# Altium PCB PCB1.PcbDoc
Units mil, origin at the board's own origin, x right, y up, seen from the top; angles counter-clockwise.
Board outline 1895 x 950 mil, 2 copper layers (Top Layer, Bottom Layer); 24 components, 14 nets, 60 pads, 1 vias.
Unrouted connection lines stored in the file: 42.
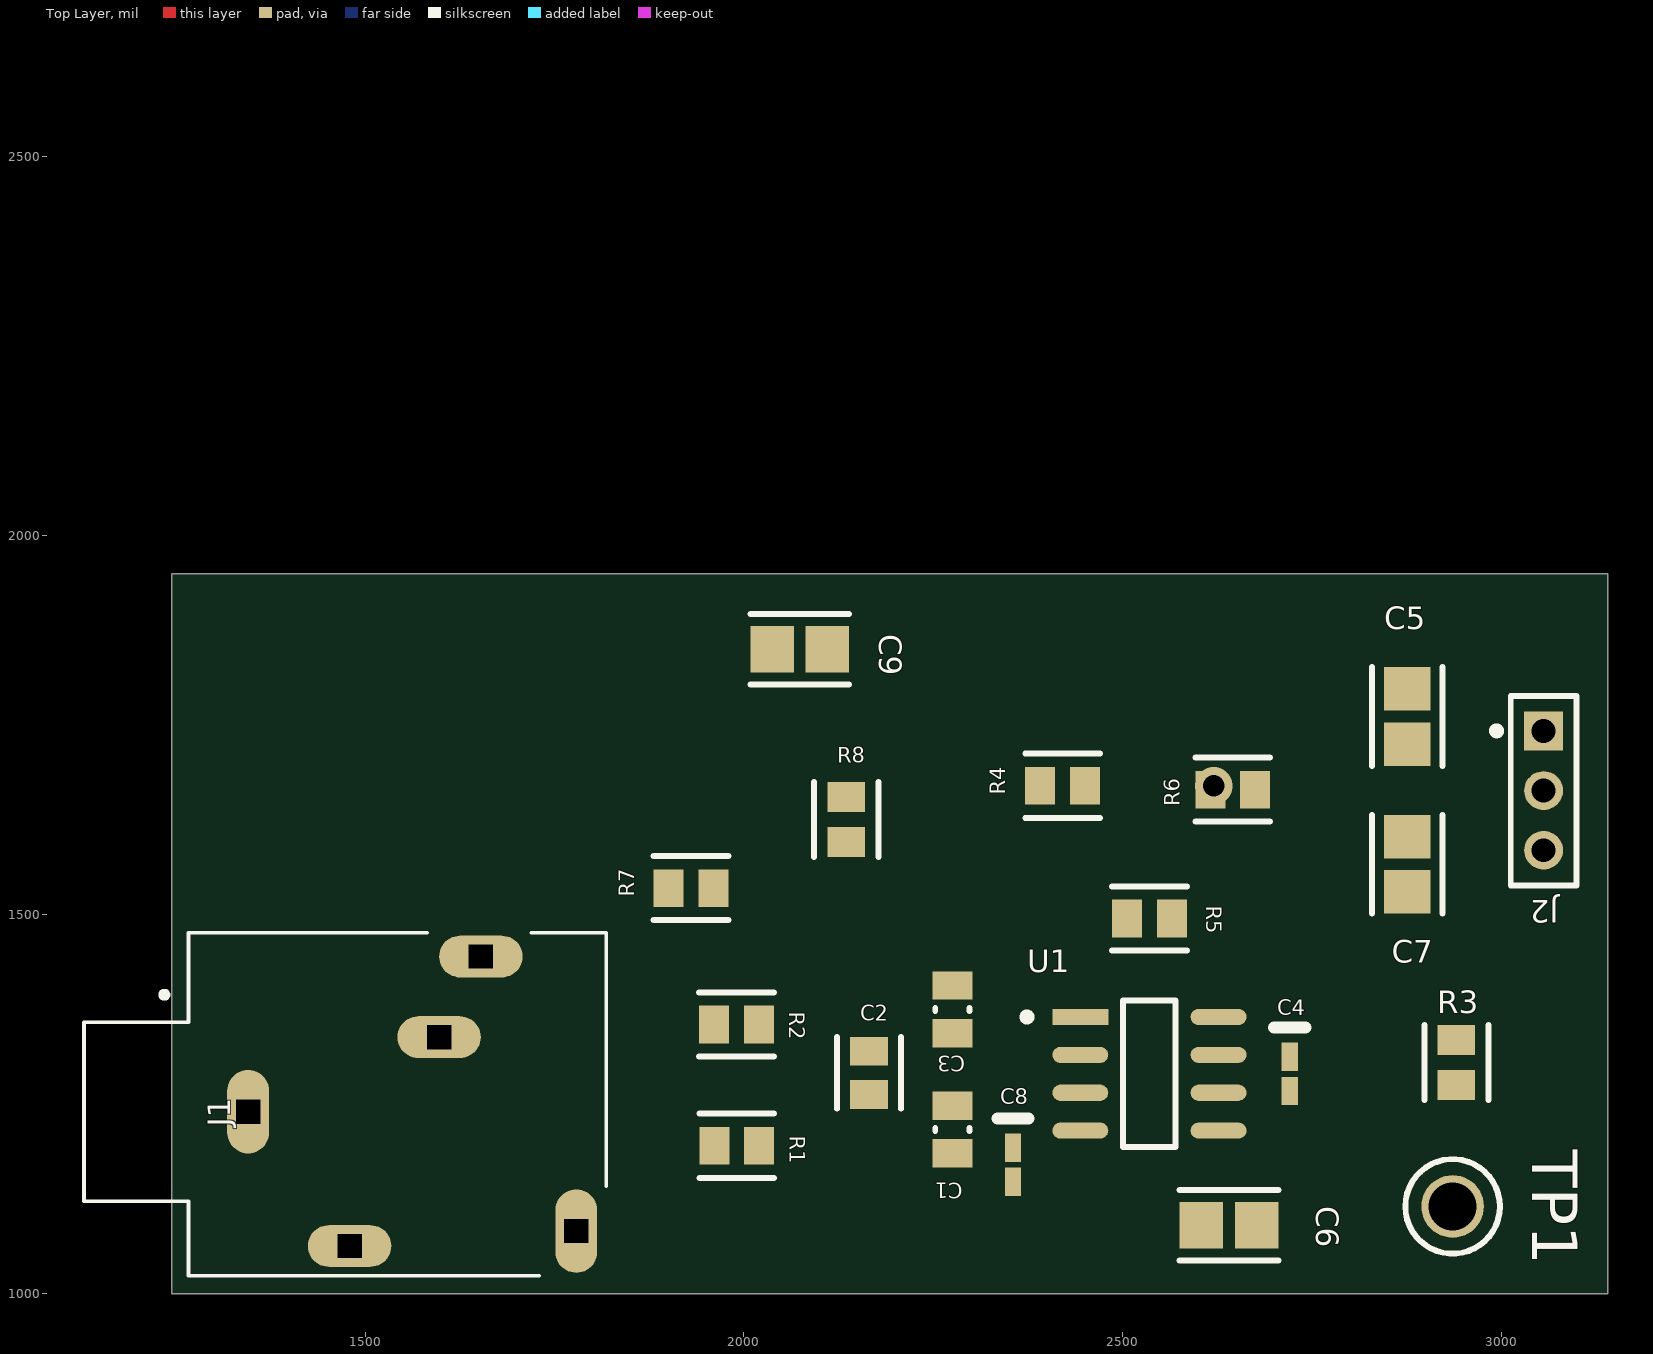
[diagram p0: Top Layer view]
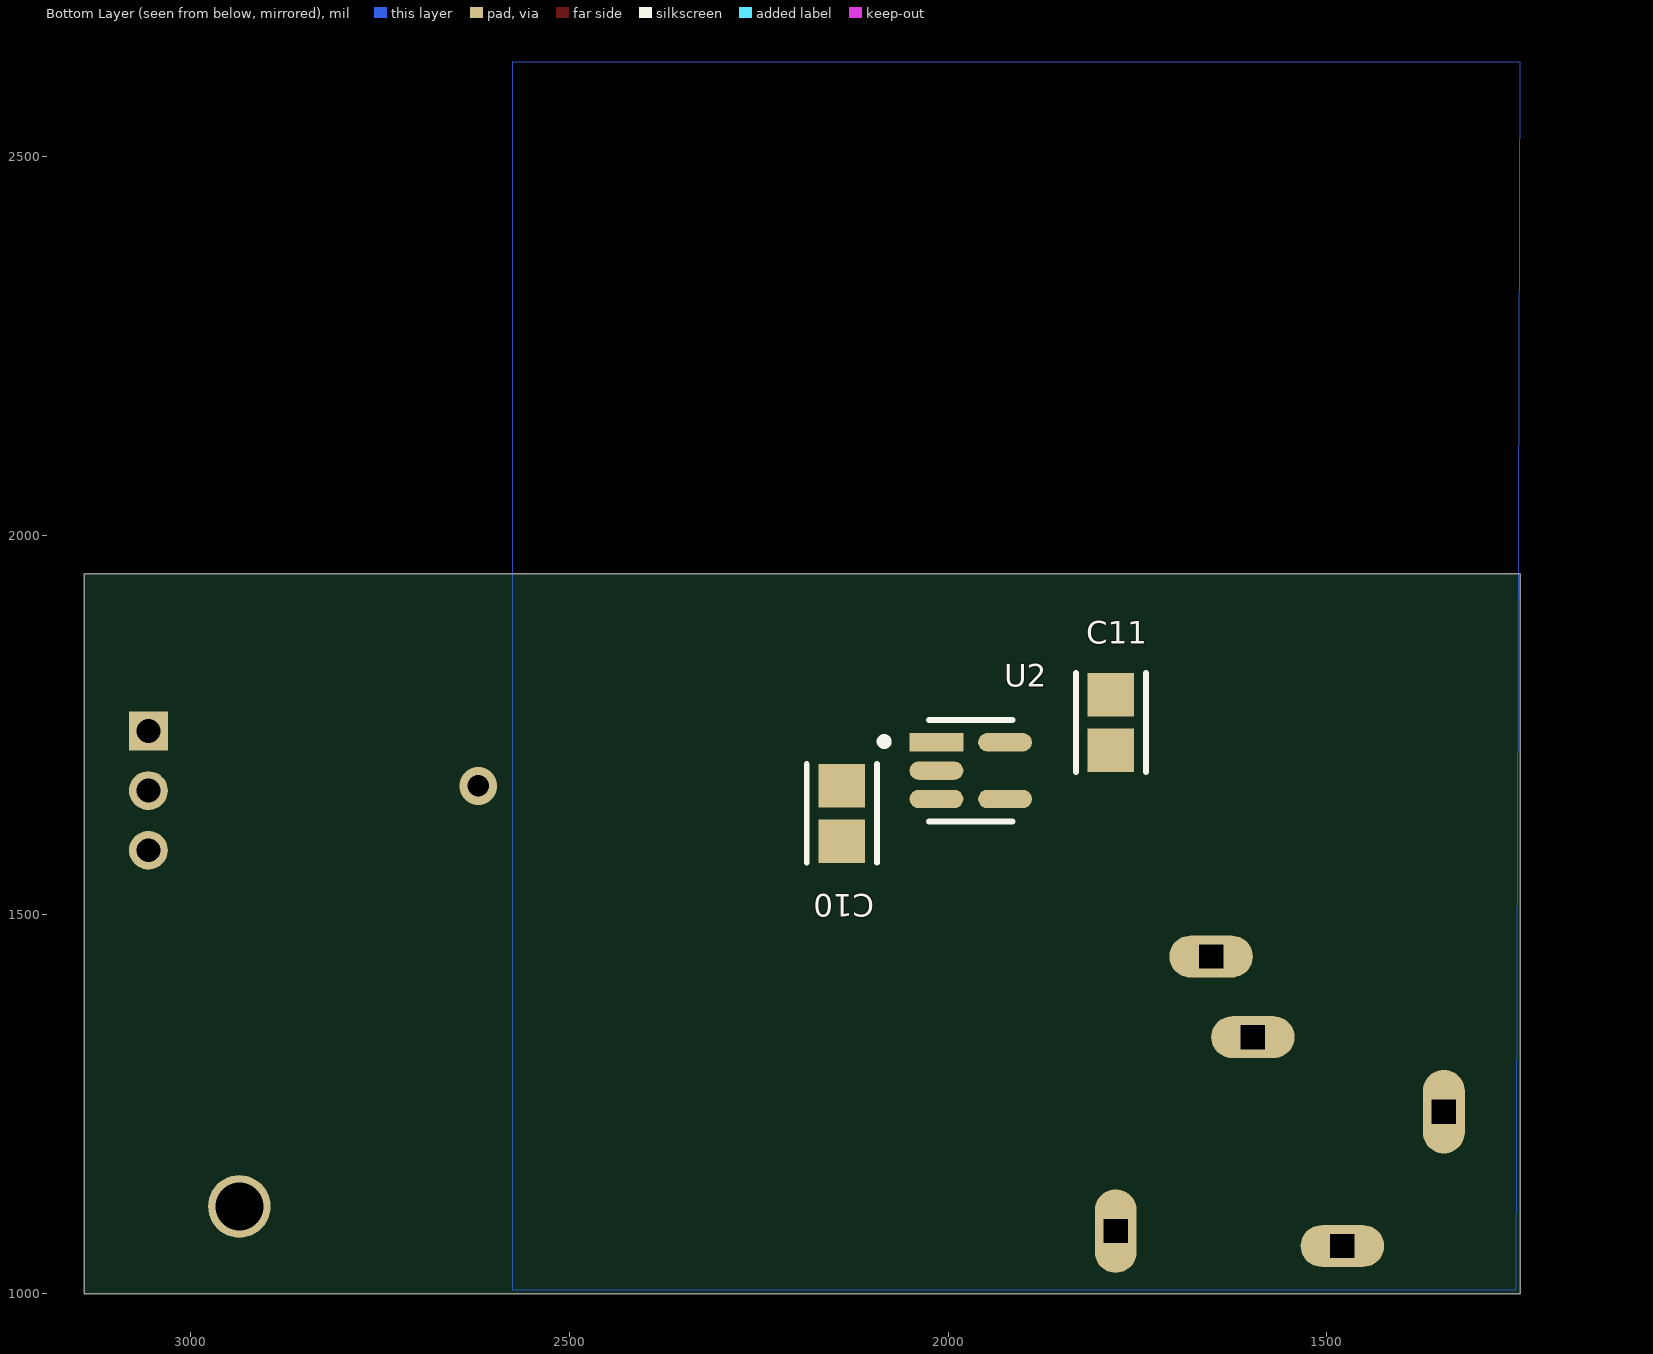
[diagram p1: Bottom Layer view, seen from below]

## Layer stack, top to bottom
Top Solder: solder mask 0.4, Solder Resist, Dk 3.5
Top Layer: signal copper 1.4
Dielectric 1: dielectric 12.6, FR-4, Dk 4.8
Bottom Layer: signal copper 1.4
Bottom Solder: solder mask 0.4, Solder Resist, Dk 3.5

## Board outline
1245,1000 3140,1000 3140,1950 1245,1950

## Design rules (kind name [scope] priority, off if disabled: settings)
Clearance [All] p1: gap=10 ignorepadtopadclearanceinfootprint=FALSE
PolygonConnect [All] p1: connectstyle=Relief reliefconductorwidth=10 reliefentries=4 polygonreliefangle="90 Angle" airgapwidth=10
RoutingVias [All] p1: holewidth=28 width=50 viastyle="Through Hole" minholewidth=28 minwidth=50 maxholewidth=28 maxwidth=50
SolderMaskExpansion [All] p1: expansion=4 istentingtop=FALSE
Width [All] p1: maxlimit=10 minlimit=10 preferedwidth=10
30 further rules are at their usual default settings.

## Components (designator, comment, footprint, x,y, rotation, side; value= is the part's Value field where it differs from the comment)
C1 "1nF" CAPC0805(2012)145_L 2275,1216.5 r270 top
C2 "47nF" FP-GRM21B-0_1-IPC_C 2165,1291.37 r90 top
C3 "1nF" CAPC0805(2012)145_L 2275,1375 r270 top
C4 "0.1uF" VISH-TR8-M_L 2720,1290 r270 top
C5 "0.1uF" FP-CL21-IPC_A 2875,1761.45 r270 top
C6 "0.1uF" FP-CL21-IPC_A 2640,1090 r0 top
C7 "0.1uF" FP-CL21-IPC_A 2875,1566.45 r90 top
C8 "0.1uF" VISH-TR8-M_L 2355,1170 r270 top
C9 "0.1uF" FP-CL21-IPC_A 2073.55,1850 r180 top
C10 "0.1uF" FP-CL21-IPC_A 2140,1633.55 r270 bottom
C11 "0.1uF" FP-CL21-IPC_A 1785,1753.55 r90 bottom
J1 "3.5mm header" SWITCHCRAFT_35RAPC4BH3 1473.69,1249.83 r0 top
J2 "M22-2510305" FP-M22-2510305-MFG 3055,1663.74 r270 top
R1 "4k" FP-ERA6A-IPC_C 1990.44,1195 r180 top
R2 "4k" FP-ERA6A-IPC_C 1990,1355 r180 top
R3 "ERA6AEB102V" FP-ERA6A-IPC_C 2940,1305 r270 top
R4 "10k" FP-ERA6A-IPC_C 2420.44,1670 r180 top
R5 "100" FP-ERA6A-IPC_C 2535,1495 r180 top
R6 "10k" FP-ERA6A-IPC_C 2645,1665 r180 top
R7 "ERA6AEB102V" FP-ERA6A-IPC_C 1930,1535 r180 top
R8 "ERA6AEB102V" FP-ERA6A-IPC_C 2135,1625.44 r90 top
TP1 "5010" KSTN-5010_V 2935,1115 r0 top
U1 "AD620BRZ-R7" FP-R-8-IPC_C 2535,1290 r0 top
U2 "TLV9151IDBVR" FP-DBV0005A-IPC_A 1970,1690 r180 bottom

## Footprints (in the part's own frame and the unit in brackets; to place one, negate y for a bottom-side part, rotate by r counter-clockwise, add the part's x,y. Pads: shape width x height; smd on the part's side, far side on the other; paste and mask are expansions set on the pad)
CAPC0805(2012)145_L [mm] "Chip Capacitor, Body 2.0x1.2mm, Height 1.45mm, IPC High Density"
  rect 0.95x1.35 smd: 1(-0.8,0) 2(0.8,0)
  silkscreen extent -0.05,-0.58 0.05,0.58, body extent -1.1,-0.72 1.1,0.72, height 1.45
FP-CL21-IPC_A [mil]
  rect 57.27x61.27 smd paste+0 mask+0: 1(-36.45,0) 2(36.45,0)
  silkscreen extent -65,-46 65,46, body extent -85,-50 85,50, height 10
FP-DBV0005A-IPC_A [mm]
  rect 1.805x0.612 smd paste+0 mask+0: 1(-1.15,0.95)
  rrect100% 1.805x0.612 smd paste+0 mask+0: 2(-1.15,0) 3(-1.15,-0.95) 4(1.15,-0.95) 5(1.15,0.95)
  silkscreen extent -3.03,-1.7 1.4,1.7, body extent -1.4,-1.45 1.4,1.45, height 1.45
FP-ERA6A-IPC_C [mil]
  rect 39.55x49.69 smd paste+0 mask+0: 1(-29.56,0) 2(29.56,0)
  silkscreen extent -49,-42 49,42, body extent -53,-31 53,31, height 10
FP-GRM21B-0_1-IPC_C [mil]
  rect 37.71x49.69 smd paste+0 mask+0: 1(-28.63,0) 2(28.63,0)
  silkscreen extent -47,-42 47,42, body extent -51,-31 51,31, height 10
FP-M22-2510305-MFG [mm]
  rect 1.3x1.3 hole 0.8: 1(-2,0)
  round 1.3 hole 0.8: 2(0,0) 3(2,0)
  silkscreen extent -3.18,-1.7 3.18,1.1, body extent -3.27,-1.2 3.27,1.2, height 0.25
FP-R-8-IPC_C [mil]
  rect 73.78x21.34 smd paste+0 mask+0: 1(-91.18,75)
  rrect100% 73.78x21.34 smd paste+0 mask+0: 2(-91.18,25) 3(-91.18,-25) 4(-91.18,-75) 5(91.18,-75) 6(91.18,-25) 7(91.18,25) 8(91.18,75)
  silkscreen extent -166,-96 35,96, body extent -132,-100 132,100, height 10
KSTN-5010_V [mm] "Test Point, Dia 3.17mm"
  round 2.1 hole 1.6: 1(0,0)
  silkscreen extent -1.59,-1.58 1.59,1.58, body extent -1.59,-1.59 1.59,1.59, height 8.13
SWITCHCRAFT_35RAPC4BH3 [mm]
  oval 1.4x2.8 hole 0.8 square: 1(-3.25,-0.25) 4(7.75,-4.25)
  oval 2.8x1.4 hole 0.8 square: 2(4.55,4.95) 3(3.15,2.25) 5(0.15,-4.75)
  silkscreen extent -8.75,-5.75 8.75,5.75, body extent -8.51,-5.71 8.99,5.79, height 6.5
VISH-TR8-M_L [mm] "Molded Capacitor, 2-Leads, Body 1.8x1.05mm, IPC High Density"
  rect 0.95x0.55 smd: 1(-0.575,0) 2(0.575,0)
  silkscreen extent -1.55,-0.53 -1.55,0.53, body extent -1.12,-0.53 1.12,0.53, height 0.9

## Part data
C1 C3: library part CMP-1036-02976-1, "CAP 1nF 50V ±5% 0805 (2012 Metric) Thickness 1.45mm SMD", Case-EIA=0805, Case-Metric=2012, Rated Voltage="50 V", Tolerance=Â±5%, Max Thickness="1.45 mm", Technology=SMT
C2: library part CMP-06035-029151-1, "Chip Multilayer Ceramic Capacitors for General Purpose, 0805, 47000pF, SL, +350/-1000ppm/°C, 5%, 50V,   GRM21B1X1H473JA01L", Case Code (Imperial)=0805, Case Code (Metric)=2012, Max Operating Temperature=125°C, Min Operating Temperature=-55°C, Tolerance=5%, Voltage Rating=50V, Capacitance=47nF, Case/Package=0805, Lead Free="Lead Free", Length=0.079inch, Mount="Surface Mount", Packaging="Tape and Reel", Termination=SMD/SMT, Thickness=0.053inch, Voltage Rating (DC)=50V, Width=0.049inch
C4: library part CMP-2000-07316-1, "Tantalum Capacitor, 10 uF, +/- 20%, 10 V, -55 to 125 degC, 2-Pin SMD (M), RoHS, Tape and Reel, TR8M106M010C2000", Capacitance=10µF, ESR (Equivalent Series Resistance)=2Ohm, Lifetime @ Temp.=-, Manufacturer=Vishay, Manufacturer Size Code=M, Operating Temperature=-55°C~125°C, Package / Case=0603(1608Metric), Package Description="2-Pin Surface Mount Device, Body 1.6 x 0.85 mm", Package Reference=TR8-M, Standard Package=1, Tolerance=±20%, Voltage - Rated=10V, Catalog Drawings=TR8SeriesTR8SeriesBottom, Category=Capacitors, Datasheet URL=http://www.vishay.com/docs/40114/tr8.pdf, Datasheet Version=03/2016, Family=TantalumCapacitors, Featured Product=TR8SeriesMoldedMicroTan™TantalumChipCapacitors, Features=GeneralPurpose, Height - Seated (Max)="0.035\"(0.89mm)", Lead Spacing=-, Manufacturer URL=http://www.vishay.com/, Mounting Technology=SurfaceMount, Mounting Type=SurfaceMount, Online Catalog=MICROTAN®TR8Series, Other Names=718-1673-6, Packaging=Digi-Reel®, Series=MICROTAN®TR8, Size / Dimension="0.063\"Lx0.033\"W(1.60mmx0.85mm)", Type=Molded
C5 C6 C7 C9 C10 C11: library part CMP-13271-004391-1, "CL21 Series 0805 100nF 25V ±20% Tolerance X7R Multilayer Ceramic Chip Capacitor, CL21B104MACNNNC", Capacitance=100nF, Case Code (Imperial)=0805, Case Code (Metric)=2012, Dielectric=X7R, Max Operating Temperature=125°C, Min Operating Temperature=-55°C, Package Quantity=1, Tolerance=20%, Voltage Rating=25V, Case/Package=0805, Construction=Flat, Depth=1.25mm, Height=0.85mm, Lead Free="Lead Free", Length=2mm, Mount="Surface Mount", Packaging="Tape and Reel", Radiation Hardening=No, RoHS Compliant=Yes, Series=CL, Thickness=0.037inch, Voltage Rating (DC)=25V, Width=0.049inch
C8: library part CMP-2000-07316-1, "Tantalum Capacitor, 10 uF, +/- 20%, 10 V, -55 to 125 degC, 2-Pin SMD (M), RoHS, Tape and Reel,   TR8M106M010C2000", Capacitance=10µF, ESR (Equivalent Series Resistance)=2Ohm, Lifetime @ Temp.=-, Manufacturer=Vishay, Manufacturer Size Code=M, Operating Temperature=-55°C~125°C, Package / Case=0603(1608Metric), Package Description="2-Pin Surface Mount Device, Body 1.6 x 0.85 mm", Package Reference=TR8-M, Standard Package=1, Tolerance=±20%, Voltage - Rated=10V, Catalog Drawings=TR8SeriesTR8SeriesBottom, Category=Capacitors, Datasheet URL=http://www.vishay.com/docs/40114/tr8.pdf, Datasheet Version=03/2016, Family=TantalumCapacitors, Featured Product=TR8SeriesMoldedMicroTan™TantalumChipCapacitors, Features=GeneralPurpose, Height - Seated (Max)="0.035\"(0.89mm)", Lead Spacing=-, Manufacturer URL=http://www.vishay.com/, Mounting Technology=SurfaceMount, Mounting Type=SurfaceMount, Online Catalog=MICROTAN®TR8Series, Other Names=718-1673-6, Packaging=Digi-Reel®, Series=MICROTAN®TR8, Size / Dimension="0.063\"Lx0.033\"W(1.60mmx0.85mm)", Type=Molded
J1: library part 35RAPC4BH3, "3.50mm (0.141\", 1/8\", Mini Plug) - Headphone Phone Jack Stereo (3 Conductor, TRS) Connector Solder", Package=None, Availability=Unavailable, MP=35RAPC4BH3, Price=None
J2: library part CMP-00671-05385874-1, "M22-2510305 Conn Unshrouded Header M 3 POS 2mm Solder ST Top Entry Thru-Hole Bulk/Loose", Case/Package=SIL, Color=Black, Contact Resistance=20mΩ, Current Rating=2A, Max Current Rating=1A, Max Operating Temperature=105°C, Min Operating Temperature=-40°C, Voltage Rating=650V, Connector Type="Male Pin", Contact Material="Gold, Nickel", Contact Mating Length=3.5052mm, Contact Plating=Gold, Depth=2mm, Gender=Male, Height=5.45mm, Housing Color=Black, Housing Material=Nylon, Length=6mm, Mount="Through Hole", Number of Contacts=3, Number of Positions=3, Number of Rows=1, Orientation=Straight, Pitch=2mm, Radiation Hardening=No, REACH SVHC="No SVHC", RoHS=Compliant, Termination=Solder
R1 R2 R5 R6: library part CMP-2001-00581-2, "RES 1K OHM 0.1% 1/8W 0805,  ERA6AEB102V", Case Code (Imperial)=0805, Case Code (Metric)=2012, Max Operating Temperature=155°C, Max Power Dissipation=125mW, Min Operating Temperature=-55°C, Package Quantity=5000, Resistance=1kR, Resistance Tolerance=0.1%, Resistor Type="Thin Film", Temperature Coefficient=25ppm/°C, Voltage Rating=100V, Case/Package=0805, Construction=Rectangular, Contact Plating=Tin, Depth=1.25mm, Height=0.5mm, Length=2mm, Military Standard=Not, Mount="Surface Mount", Number of Pins=2, Number of Terminations=2, Packaging="Tape and Reel", Power Rating=125mW, Radiation Hardening=No, REACH SVHC="No SVHC", RoHS Compliant=Yes, Series=ERA-6A, Technology="THIN FILM", Termination=SMD/SMT, Tolerance=0.1%, Width=1.25mm, Working Voltage=100V
R3 R7 R8: library part CMP-2001-00581-2, "RES 1K OHM 0.1% 1/8W 0805", Case Code (Imperial)=0805, Case Code (Metric)=2012, Max Operating Temperature=155°C, Max Power Dissipation=125mW, Min Operating Temperature=-55°C, Package Quantity=5000, Resistance=1kR, Resistance Tolerance=0.1%, Resistor Type="Thin Film", Temperature Coefficient=25ppm/°C, Voltage Rating=100V, Case/Package=0805, Construction=Rectangular, Contact Plating=Tin, Depth=1.25mm, Height=0.5mm, Length=2mm, Military Standard=Not, Mount="Surface Mount", Number of Pins=2, Number of Terminations=2, Packaging="Tape and Reel", Power Rating=125mW, Radiation Hardening=No, REACH SVHC="No SVHC", RoHS Compliant=Yes, Series=ERA-6A, Technology="THIN FILM", Termination=SMD/SMT, Tolerance=0.1%, Width=1.25mm, Working Voltage=100V
R4: library part CMP-2001-00581-2, "RES 1K OHM 0.1% 1/8W 0805,    ERA6AEB102V", Case Code (Imperial)=0805, Case Code (Metric)=2012, Max Operating Temperature=155°C, Max Power Dissipation=125mW, Min Operating Temperature=-55°C, Package Quantity=5000, Resistance=1kR, Resistance Tolerance=0.1%, Resistor Type="Thin Film", Temperature Coefficient=25ppm/°C, Voltage Rating=100V, Case/Package=0805, Construction=Rectangular, Contact Plating=Tin, Depth=1.25mm, Height=0.5mm, Length=2mm, Military Standard=Not, Mount="Surface Mount", Number of Pins=2, Number of Terminations=2, Packaging="Tape and Reel", Power Rating=125mW, Radiation Hardening=No, REACH SVHC="No SVHC", RoHS Compliant=Yes, Series=ERA-6A, Technology="THIN FILM", Termination=SMD/SMT, Tolerance=0.1%, Width=1.25mm, Working Voltage=100V
TP1: library part CMP-1672-00002-4, "Test Point, Red, Through Hole, RoHS, Bulk", Colour=Red, Manufacturer=Keystone, Package Quantity=100, ComponentLink1Description="Manufacturer URL", ComponentLink1URL=http://www.keyelco.com/, ComponentLink2Description=Datasheet, ComponentLink2URL=http://www.keyelco.com/product-pdf.cfm?p=1319, Contact Material=Bronze, Contact Plating=Silver, DatasheetVersion="Rev. F, 12/2013", Height="8.12 mm", Mount="Through Hole", Mounting Technology="Through Hole", PackageDescription="1-Pin Through Hole Device, Dia 3.17 mm", PackageReference=5010, Packaging=Bulk, Pins=1, REACH SVHC="No SVHC", RoHSCompliant=true
U1: library part CMP-09116-000394-1, "IC INST AMP 1 CIRCUIT 8SOIC", Case/Package=SOIC, Input Bias Current=1nA, Input Offset Voltage (Vos)=30mV, Input Resistance=10GR, Max Dual Supply Voltage=18V, Max Operating Temperature=125°C, Max Power Dissipation=650mW, Min Dual Supply Voltage=2.3V, Min Operating Temperature=-55°C, Min Supply Voltage=4.6V, Nominal Supply Current=1.3mA, Output Current per Channel=18mA, Package Quantity=1, -3db Bandwidth=1MHz, Amplifier Type="INSTRUMENTATION AMPLIFIER", Common Mode Rejection Ratio=93dB, Contact Plating=Tin, Lead Free="Contains Lead", Mount="Surface Mount", Number of Channels=1, Number of Circuits=1, Number of Elements=1, Number of Pins=8, Operating Supply Current=1.3mA, Operating Supply Voltage=18V, Packaging="Tape and Reel", Power Dissipation=650mW, Radiation Hardening=No, RoHS Compliant=Yes, Series=-, Slew Rate=1.2V/µs
U2: library part CMP-04895-000336-1, "OPAMP"

## Via types
v1: diameter 50, hole 28, Top Layer to Bottom Layer, 1 vias

## Nets (pads, with @x,y where several pads share a name; then routed paths per layer and width w, separated by ;. In a path a pad name is that pad's centre, name@x,y a point inside that pad or via, vN(x,y) a via of type N, cw(c..) or ccw(c..) an arc to the next point about the centre after c; other vN are vias at no path point)
+5: C4.1 C5.1 C11.1 J2.1 U1.7 U2.5
-5: C7.1 C8.1 C10.1 J2.3 U1.4 U2.2
GND: C1.2 C3.1 C4.2 C5.2 C7.2 C8.2 C10.2 C11.2 J2.2 R3.1 U1.5 U2.3
In1: C1.1 C2.1 R1.1 U1.3
In2: C2.2 C3.2 R2.1 U1.2
LA: J1.3 R2.2
NetC6_1: C6.1 U1.6
NetC6_2: C6.2 R3.2 TP1.1
NetC9_2: C9.2 R7.1
NetR4_2: R4.2 R5.2 U1.1
NetR5_1: R5.1 R6.1 U1.8
RA: J1.4 R1.2
RLD: C9.1 J1.1 R8.1 U2.1
RLi: R4.1 R6.2 R7.2 R8.2 U2.4
  other v1: 2619.78,1670
pads on no net: J1.2 J1.5

## Polygon pours and split planes (outlines as drawn)
GND on Bottom Layer "NONET_L02_P000" (solid, shelved, pour order 0): 1245.02,2625 2575,2625 2575,1005 1250.12,1005